# Altium PCB PCB Other V2.PcbDoc
Units mm, origin at the board's own origin, x right, y up, seen from the top; angles counter-clockwise.
Board outline 66.8 x 64.9 mm, 2 copper layers (Top Layer, Bottom Layer); 3 components, 6 nets, 27 pads, 8 vias.
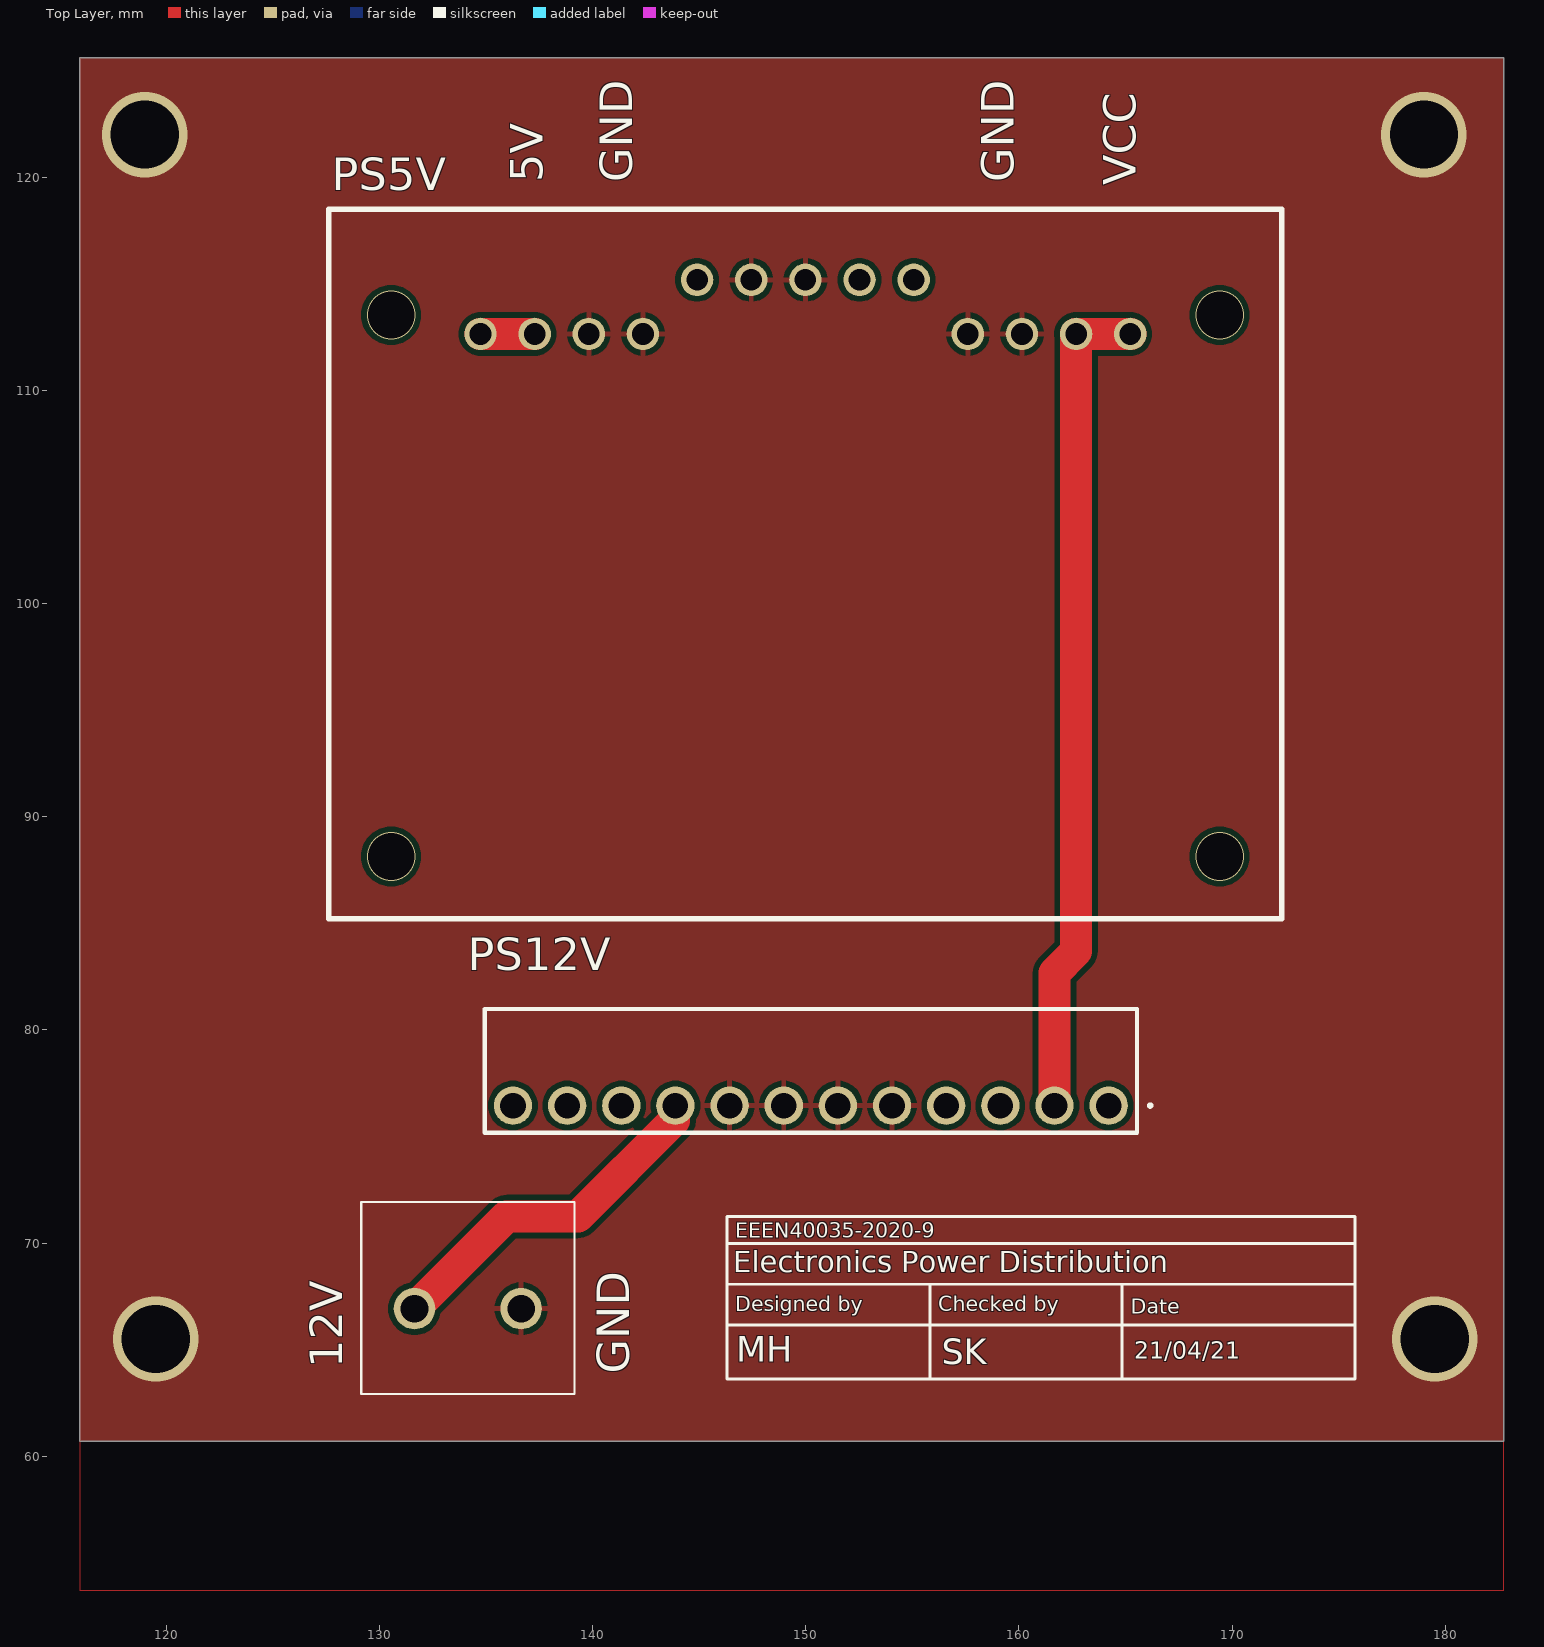
[diagram p0: Top Layer view]
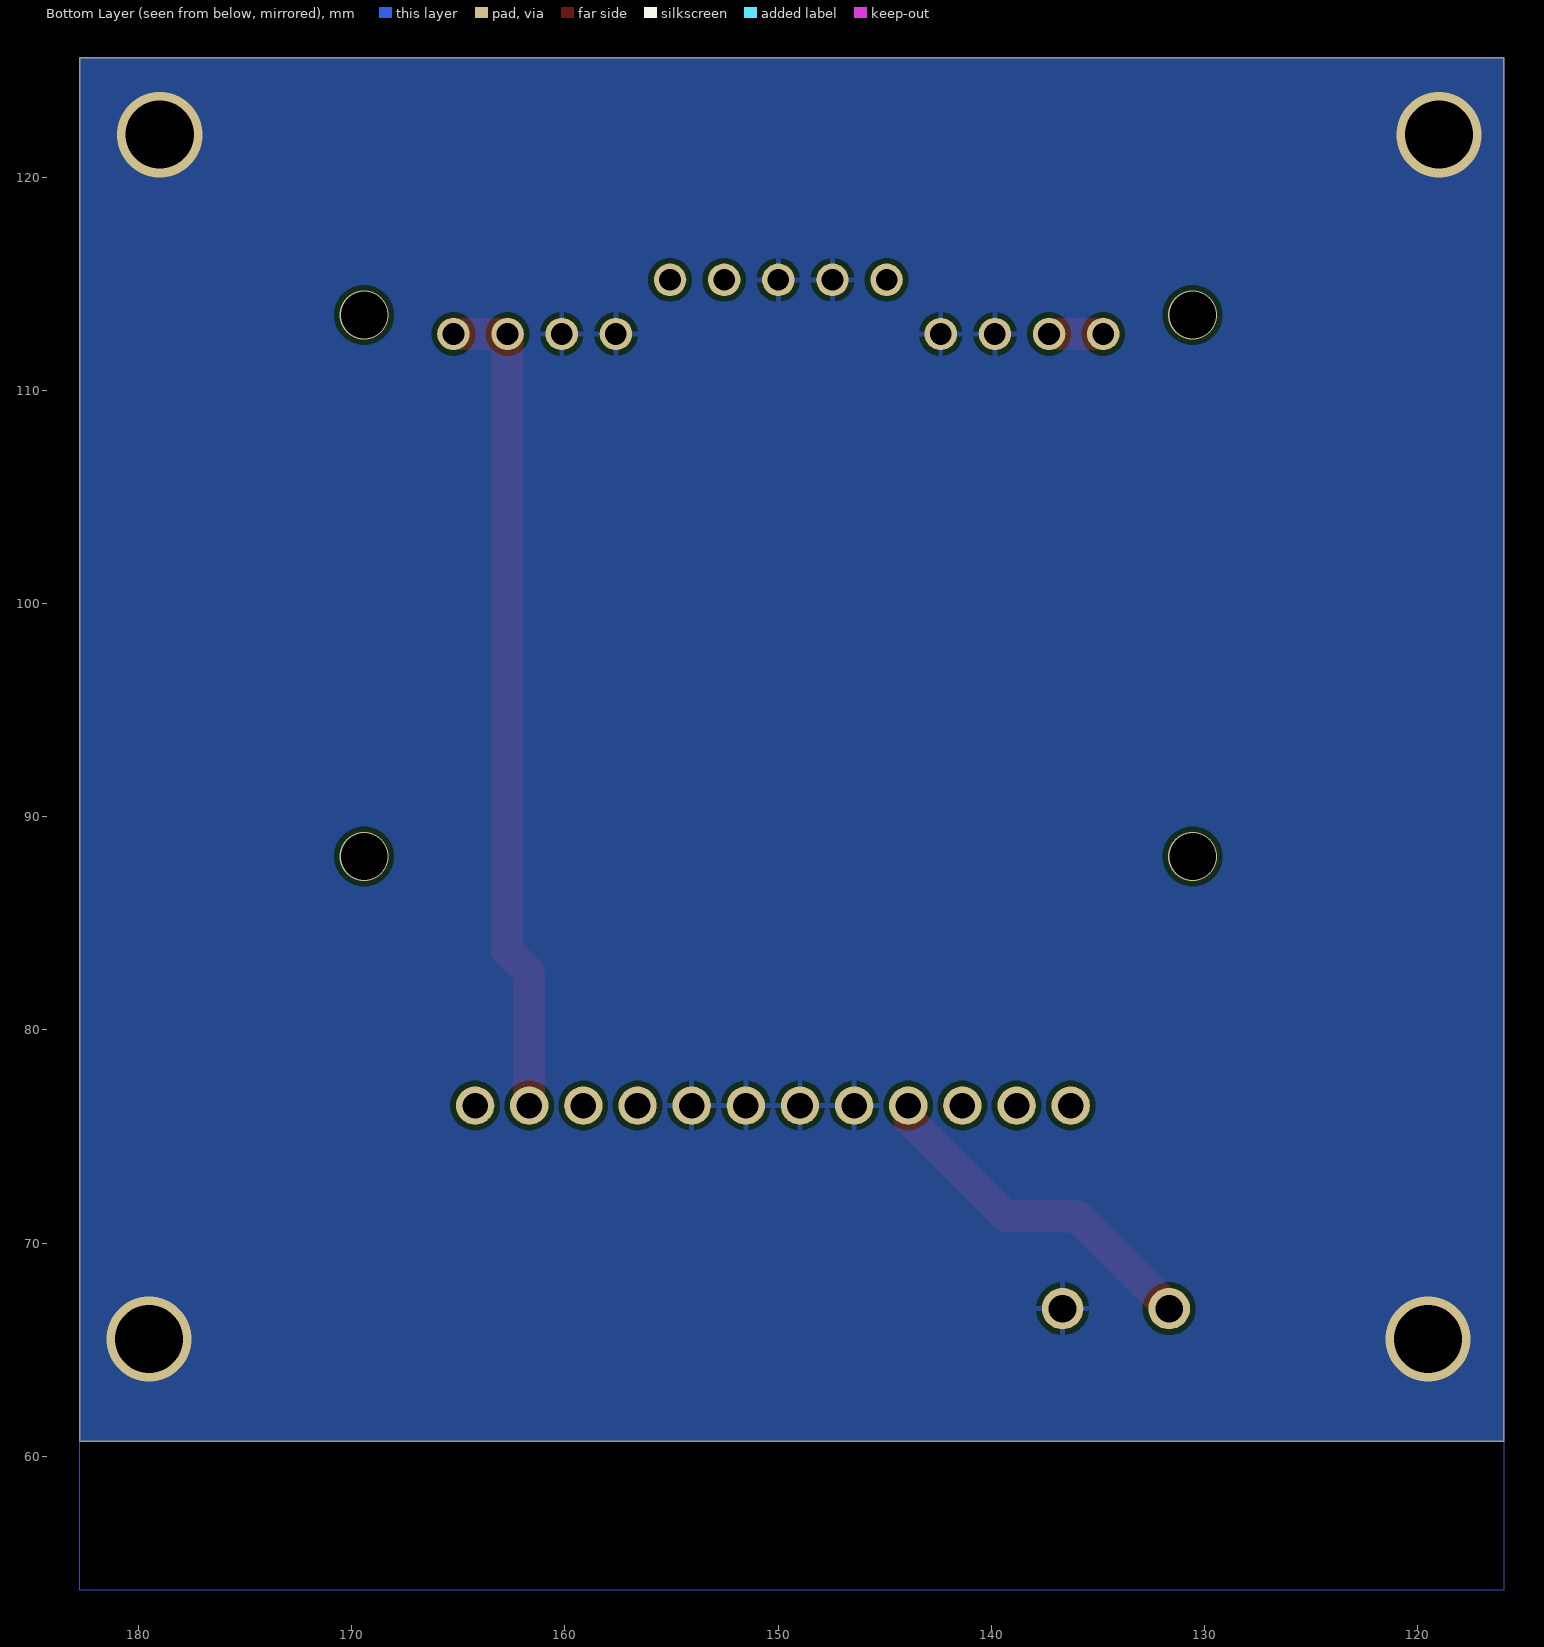
[diagram p1: Bottom Layer view, seen from below]
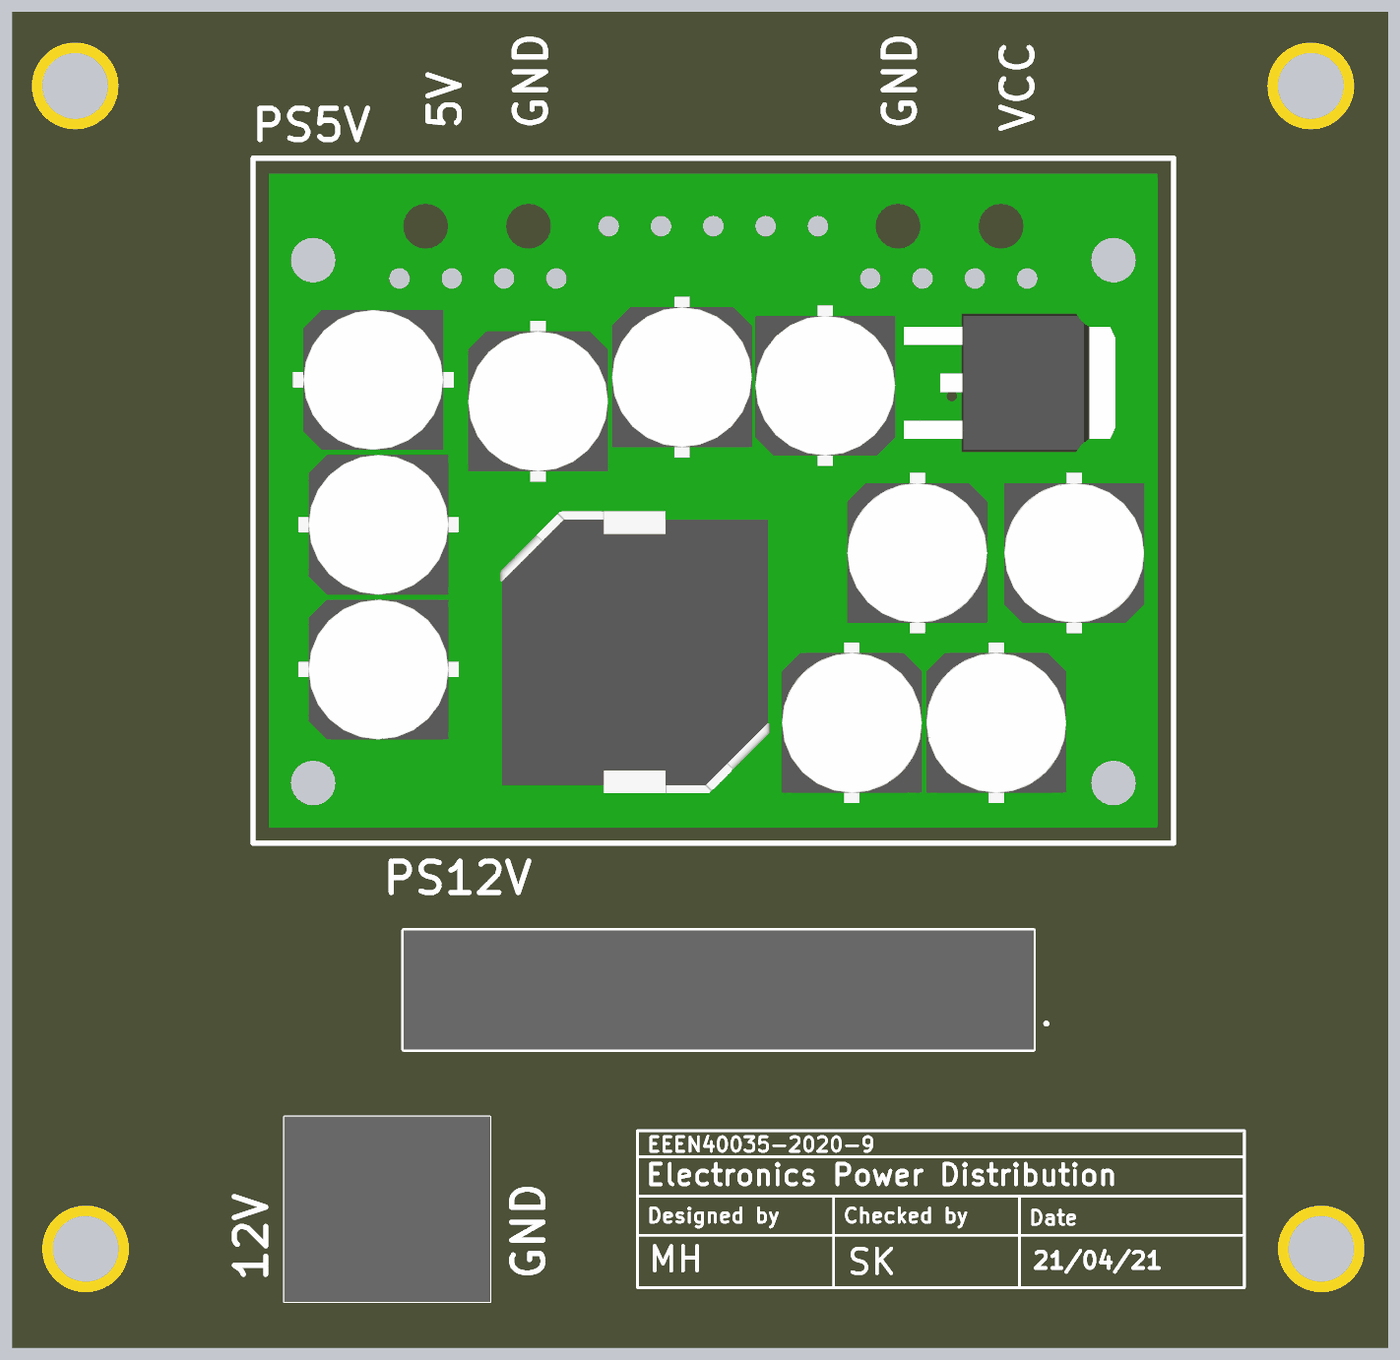
[diagram p2: 3D render of the assembled board from above, using the file's embedded part models]

## Layer stack, top to bottom
Top Solder: solder mask 0.0102, Solder Resist, Dk 3.5
Top Layer: signal copper 0.0356
Dielectric 1: dielectric 0.32, FR-4, Dk 4.8
Bottom Layer: signal copper 0.0356
Bottom Solder: solder mask 0.0102, Solder Resist, Dk 3.5

## Board outline
115.951,60.706 182.753,60.706 182.753,125.603 115.951,125.603

## Design rules (kind name [scope] priority, off if disabled: settings)
Clearance [All] p1: gap=0.254 ignorepadtopadclearanceinfootprint=FALSE except(0: Arc-Hole Track-Hole SMDPad-Hole THPad-Hole Via-Hole Fill-Hole Poly-Hole Region-Hole Text-Hole)
PolygonConnect [All] p1: connectstyle=Relief reliefconductorwidth=0.254 reliefentries=4 polygonreliefangle="90 Angle" airgapwidth=0.254
RoutingVias [All] p1: holewidth=0.711 width=1.27 viastyle="Through Hole" minholewidth=0.711 minwidth=1.27 maxholewidth=0.711 maxwidth=1.27
SolderMaskExpansion [All] p1: expansion=0.102 istentingtop=FALSE
Width [All] p1: maxlimit=0.254 minlimit=0.254 preferedwidth=0.254
30 further rules are at their usual default settings.

## Components (designator, comment, footprint, x,y, rotation, side; value= is the part's Value field where it differs from the comment)
12V "TB001-500-02BE" TB00150002BE 131.652,66.929 r0 top
PS5V "D24V150F5" D24V150F5 171.577,117.729 r180 top
PS12V "P783F-Q24-S12-S" P783FQ24S12S 164.211,76.454 r180 top

## Footprints (in the part's own frame and the unit in brackets; to place one, negate y for a bottom-side part, rotate by r counter-clockwise, add the part's x,y. Pads: shape width x height; smd on the part's side, far side on the other; paste and mask are expansions set on the pad)
D24V150F5 [mil] "PS*"
  round 60 hole 40: 1(250,200) 1(350,200) 2(450,200) 2(550,200) 3(650,100) 4(750,100) 5(850,100) 6(950,100) 7(1050,100) 8(1150,200) 8(1250,200) 9(1350,200) 9(1450,200)
  silkscreen extent -30,-30 1730,1280, body extent 0,0 1700,1250, height 448
P783FQ24S12S [mm]
  round 1.8 hole 1.2: 1(0,0) 2(2.54,0) 3(5.08,0) 4(7.62,0) 5(10.16,0) 6(12.7,0) 7(15.24,0) 8(17.78,0) 9(20.32,0) 10(22.86,0) 11(25.4,0) 12(27.94,0)
  silkscreen extent -2,-4.53 29.27,1.27, body extent -1.33,-4.53 29.27,1.27, height 13.1
TB00150002BE [mm]
  round 1.95 hole 1.3: 1(0,0) 2(5,0)
  silkscreen extent -2.5,-4 7.5,5, body extent -2.5,-4 7.5,5, height 13

## Part data
12V: "Integrated Circuit", Manufacturer_Name="CUI Inc.", Mouser2 Part Number=490-TB001-500-02BE, Datasheet Link=https://componentsearchengine.com//TB001-500-02BE.pdf, Height=12.9mm, Manufacturer_Part_Number=TB001-500-02BE, Mouser2 Price/Stock=https://www.mouser.com/Search/Refine.aspx?Keyword=490-TB001-500-02BE
PS5V: "5V, 15A Step-Down Voltage Regulator"
PS12V: "Power Supply", Manufacturer_Name="CUI Inc.", Datasheet Link=https://www.cui.com/product/resource/p783f-s.pdf, Height=13mm, Manufacturer_Part_Number=P783F-Q24-S12-S

## Via types
v1: diameter 2.286, hole 2.184, Top Layer to Bottom Layer, 4 vias
v2: diameter 4, hole 3.2, Top Layer to Bottom Layer, 4 vias

## Nets (pads, with @x,y where several pads share a name; then routed paths per layer and width w, separated by ;. In a path a pad name is that pad's centre, name@x,y a point inside that pad or via, vN(x,y) a via of type N, cw(c..) or ccw(c..) an arc to the next point about the centre after c; other vN are vias at no path point)
GND: 12V.2 PS5V.2 PS5V.5 PS5V.6 PS5V.8 PS12V.5 PS12V.6 PS12V.7 PS12V.8
  other v2: 119.508,65.509 179.508,65.509 119,122 179,122
NetPS24V_7: 
VCC: PS5V.1 PS12V.2 | length 39.2
  Top Layer w1.5: PS12V.2 161.671,82.677 162.687,83.693 162.687,112.649 PS5V.1@165.227,112.649
VCC_5V: PS5V.9 | length 2.5
  Top Layer w1.5: PS5V.9@134.747,112.649 PS5V.9@137.287,112.649
VCC_12V: 12V.1 PS12V.9 | length 16.6
  Top Layer w1.5: 12V.1 135.97,71.247 139.319,71.247 143.834,75.762 143.834,76.397 PS12V.9
VCC_24V: 
pads on no net: PS5V.3 PS5V.4 PS5V.7 PS12V.1 PS12V.3 PS12V.4 PS12V.10 PS12V.11 PS12V.12
copper on no net:
  other v1: 130.556,88.138 169.418,88.138 130.556,113.538 169.418,113.538

## Polygon pours and split planes (outlines as drawn)
GND on Top Layer "GND_L01_P002" (solid, pour order 2): 115.951,125.603 182.753,125.603 182.753,60.706 115.951,60.706
GND on Top Layer "GND_L01_P000" (hatched 90Degree grid 0 track 0.2, shelved, pour order 0): 115.951,54.102 115.951,53.721 182.753,53.721 182.753,125.603 179.578,125.603 176.657,125.603 115.951,125.603
GND on Bottom Layer "GND_L02_P003" (solid, pour order 3): 115.951,125.603 182.753,125.603 182.753,60.706 115.951,60.706
GND on Bottom Layer "NONET_L02_P001" (hatched 90Degree grid 0 track 0.2, shelved, pour order 1): 115.951,125.603 115.951,53.721 182.753,53.721 182.753,125.603 176.911,125.603

## Silkscreen, mask and mechanical layers (free items; w line width, h text height)
Top Overlay:
  lines w0.14: 146.304,66.167 175.768,66.167 ; 146.304,69.977 175.768,69.977 ; 155.829,63.627 155.829,68.072 ; 164.846,63.627 164.846,68.072 ; 175.768,68.072 146.304,68.072 ; 146.304,68.072 146.304,71.247 175.768,71.247 175.768,67.945 175.768,63.627 146.304,63.627 146.304,68.072
  text "5V" at 137.668,119.761 h1.52 r90
  text "GND" at 141.859,119.761 h1.52 r90
  text "GND" at 159.766,119.761 h1.52 r90
  text "VCC" at 165.481,119.634 h1.52 r90
  text "EEEN40035-2020-9" at 146.698,70.244 h0.7
  text "Electronics Power Distribution" at 146.611,68.633 h1
  text "Designed by" at 146.698,66.794 h0.7
  text "Checked by" at 156.223,66.794 h0.7
  text "Date" at 165.24,66.688 h0.7
  text "21/04/21" at 165.407,64.569 h0.8
  text "MH" at 146.738,64.442 h1.2
  text "SK" at 156.39,64.315 h1.2
  text "GND" at 141.732,63.881 h1.52 r90